# EAGLE board vin-5v-regulator (EAGLE 9.6.2)
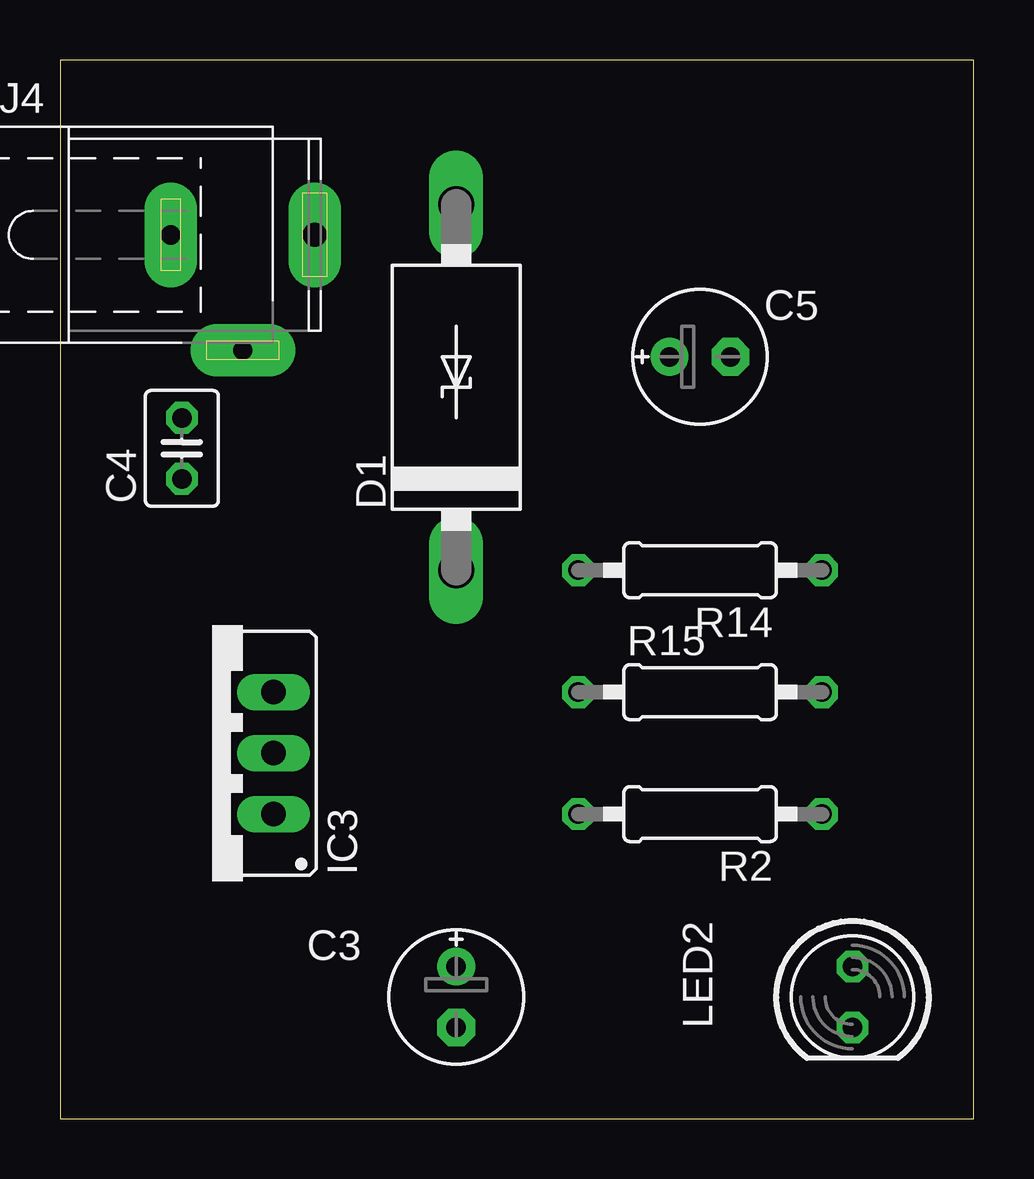
[diagram p0: board, top side]
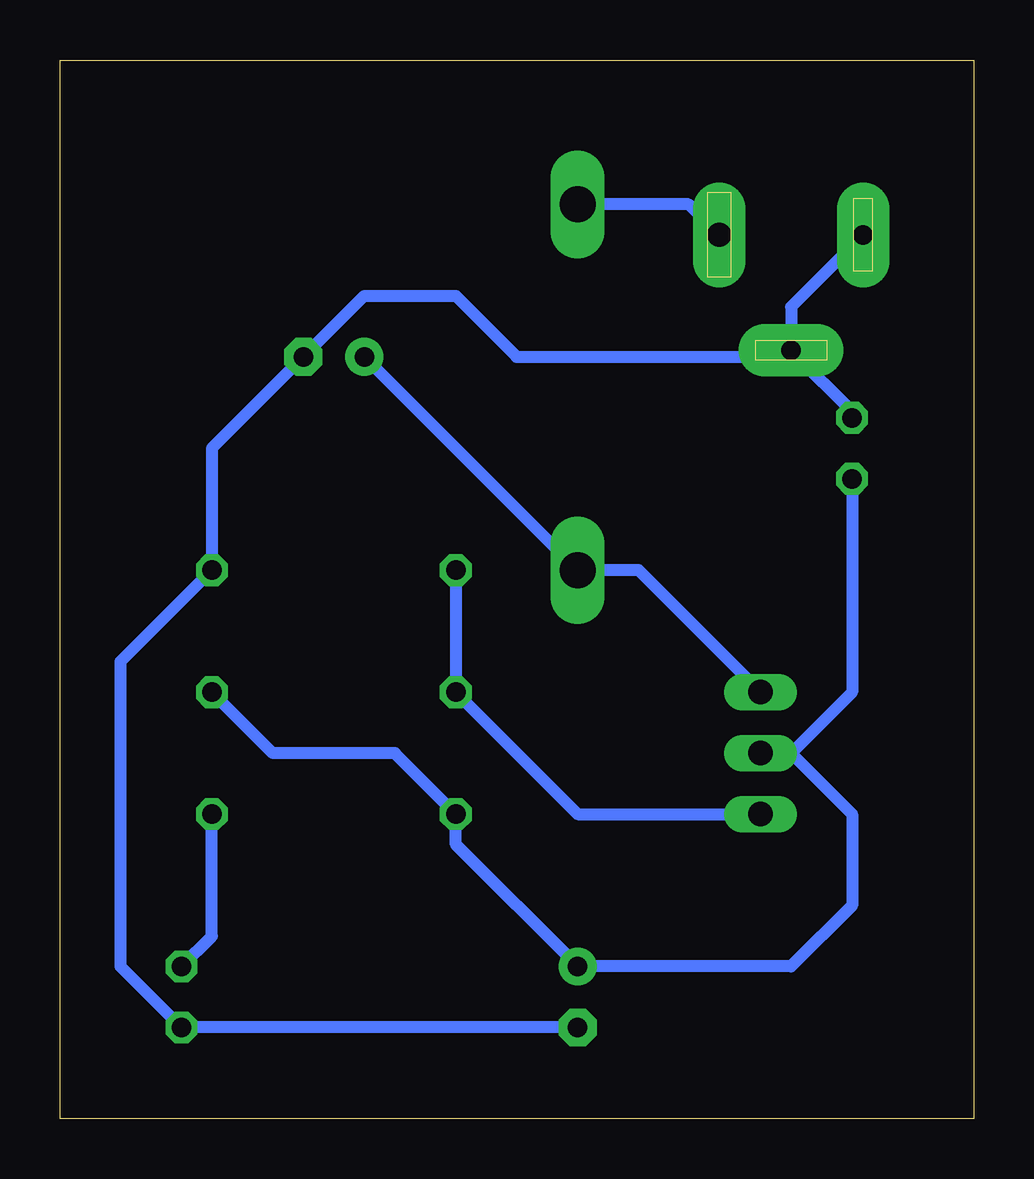
[diagram p1: board, bottom side, seen from below]

Size 38.08 x 44.12 mm. Coordinates in mm from the lower left corner, seen from the top.
Outline: 0,0 38.08,0 38.08,44.12 0,44.12 0,0
Copper layers (1*16): Top 0.035mm / dielectric 1.5mm / Bottom 0.035mm
Design rules "default": minimum track width 6mil, minimum drill 0.35mm, track to track 6mil, track to pad 6mil, pad to pad 6mil, via to via 6mil, smd to smd 6mil, copper to edge 40mil, drill to drill 6mil, minimum pad ring 10mil, minimum via ring 8mil, stop-mask expansion 4mil, vias tented up to drill 0mil, thermal gap 10mil

## Footprints (pad centres in the part's own frame; a part is rotated, then mirrored left to right if it is on the bottom)
E2,5-6E = drill 0.813 pad 1.575: + -1.27,0 | drill 0.813 pad 1.575 octagon: - 1.27,0
C025-030X050 = drill 0.813 octagon: 1 -1.27,0; 2 1.27,0
C4111-15 = drill 1.499 long: A 7.62,0; C -7.62,0
317TS = drill 1.016 long: 1 -2.54,-2.54; 2 0,-2.54; 3 2.54,-2.54
SPC4077 = drill 0.8 pad 2.184 long: 1 -3,0; 2 0,-4.8 | drill 1 pad 2.184 long: 3 3,0
LED5MM = drill 0.813 octagon: A -1.27,0; K 1.27,0
0207/10 = drill 0.813 octagon: 1 -5.08,0; 2 5.08,0

## Placement (x,y rotation side)
C3  10uF  [E2,5-6E]  16.51,5.08 270 top
C4  100nF  [C025-030X050]  5.08,27.94 90 top
C5  47uF  [E2,5-6E]  26.67,31.75 0 top
D1  1N5908  [C4111-15]  16.51,30.48 90 top
IC3  LM317  [317TS]  6.35,15.24 90 top
J4  [SPC4077]  7.62,36.83 0 top
LED2  VERDE  [LED5MM]  33.02,5.08 270 top
R2  1K  [0207/10]  26.67,12.7 180 top
R14  715  [0207/10]  26.67,22.86 180 top
R15  240  [0207/10]  26.67,17.78 0 top

## Library data of the parts
C3-C5 = rcl; SPICEPREFIX: C
D1 = diode
IC3 = v-reg
J4 = con-jack; OC_FARNELL: unknown; OC_NEWARK: unknown
LED2 = led
R2 R14 R15 = rcl; SPICEPREFIX: R

## Nets
+5V: C3.+ C4.1 IC3.2 R2.2 R15.2
GND: C3.- C4.2 C5.- J4.1 J4.2 LED2.K R14.1
N$1: D1.A J4.3
N$2: C5.+ D1.C IC3.3
N$3: IC3.1 R14.2 R15.1
N$4: LED2.A R2.1

## Tracks (layer width: path | path; a pad name or v marks a point on that pad's centre or on a via)
+5V
  Bottom 0.508: C4.1 5.08,17.78 7.62,15.24 | 7.62,15.24 5.08,12.7 5.08,8.89 7.62,6.35 C3.+ 21.59,11.43 R2.2 24.13,15.24 29.21,15.24 R15.2 | IC3.2 7.62,15.24
GND
  Bottom 0.508: J4.1 7.62,33.83 J4.2 7.48,31.89 | 7.48,31.89 5.08,29.49 C4.2 | C3.- LED2.K 35.56,6.35 35.56,19.05 R14.1 31.75,27.94 C5.- 25.4,34.29 21.59,34.29 19.05,31.75 7.62,31.75 7.48,31.89
N$1
  Bottom 0.508: J4.3 11.89,38.1 D1.A
N$2
  Bottom 0.508: IC3.3 13.97,22.86 D1.C C5.+
N$3
  Bottom 0.508: R14.2 R15.1 16.51,12.7 IC3.1
N$4
  Bottom 0.508: LED2.A 31.75,7.62 R2.1